# Altium PCB PCB1.PcbDoc
Units mm, origin at the board's own origin, x right, y up, seen from the top; angles counter-clockwise.
Board outline 42.32 x 32.64 mm, 2 copper layers (Top Layer, Bottom Layer); 25 components, 32 nets, 145 pads, 19 vias.
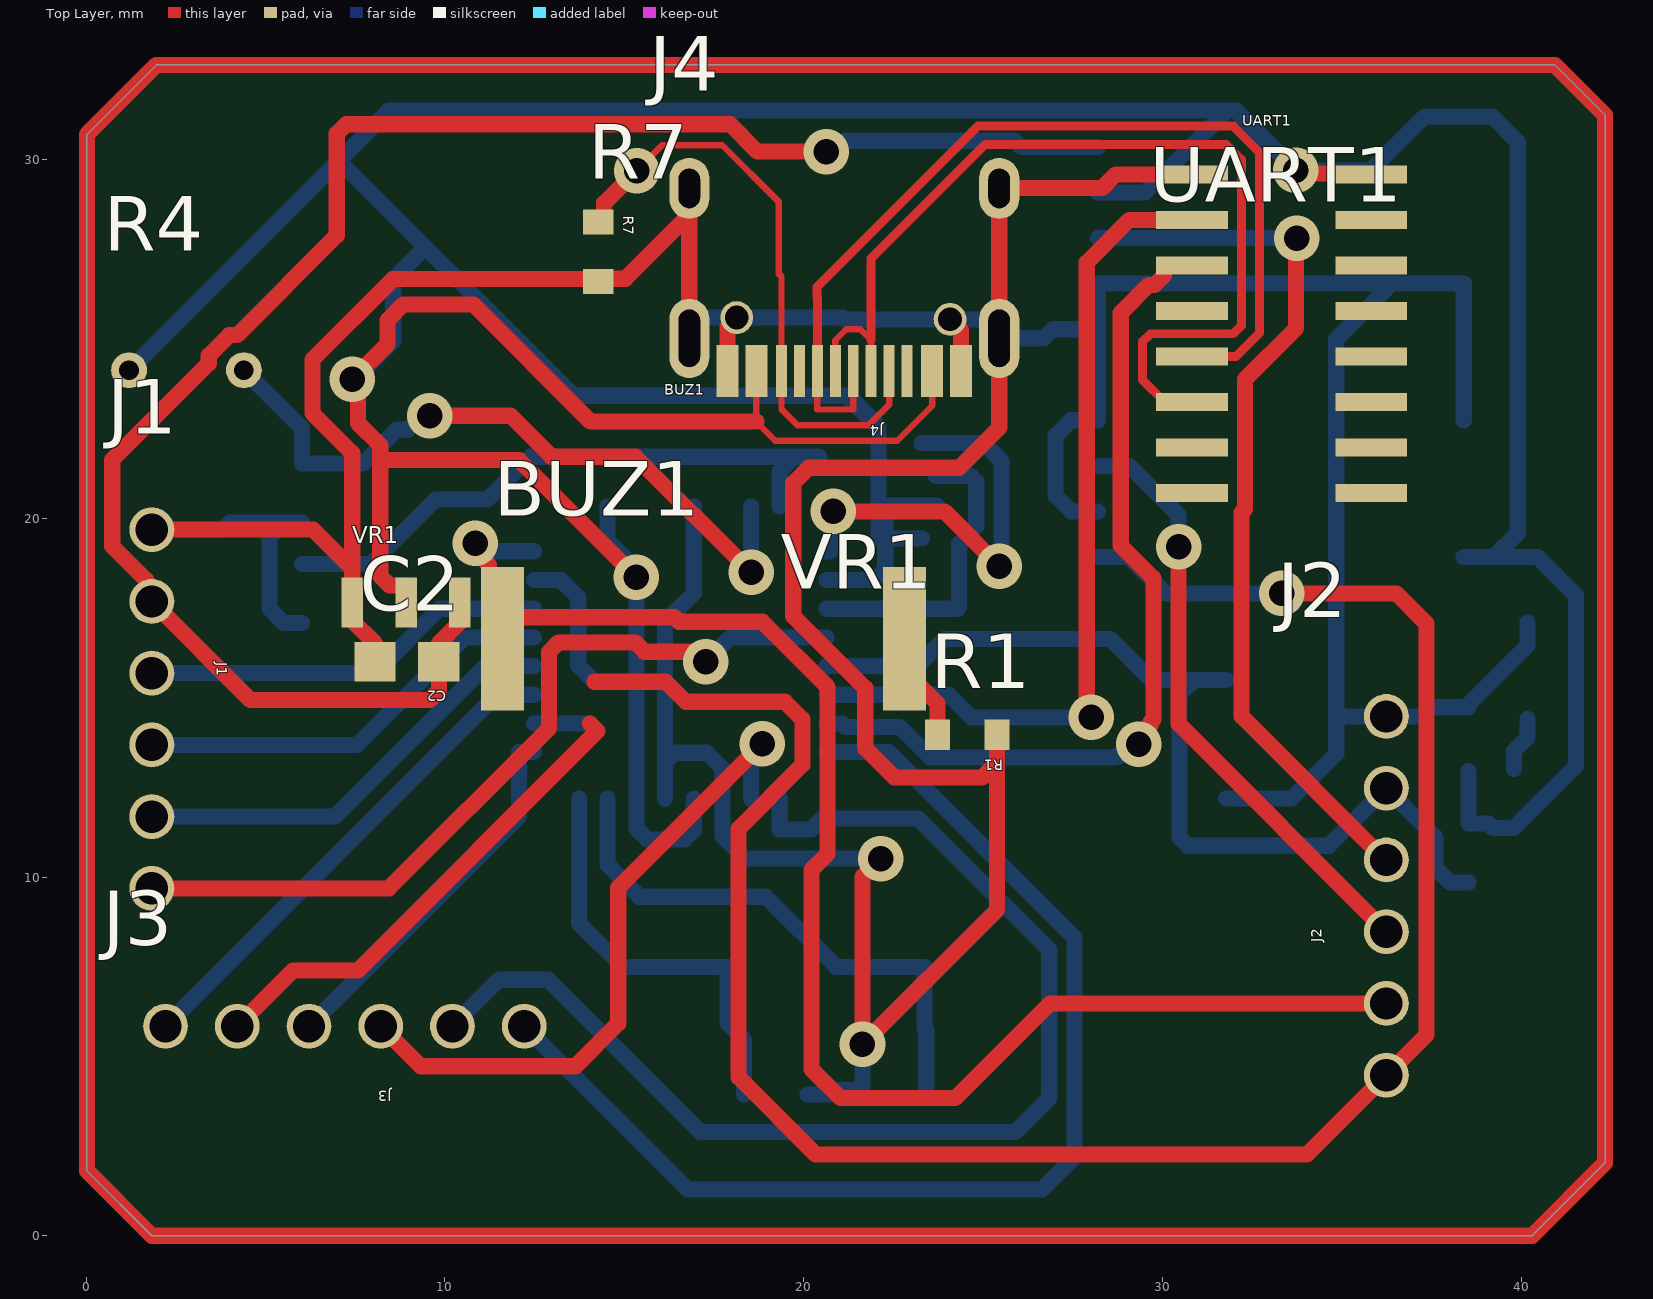
[diagram p0: Top Layer view]
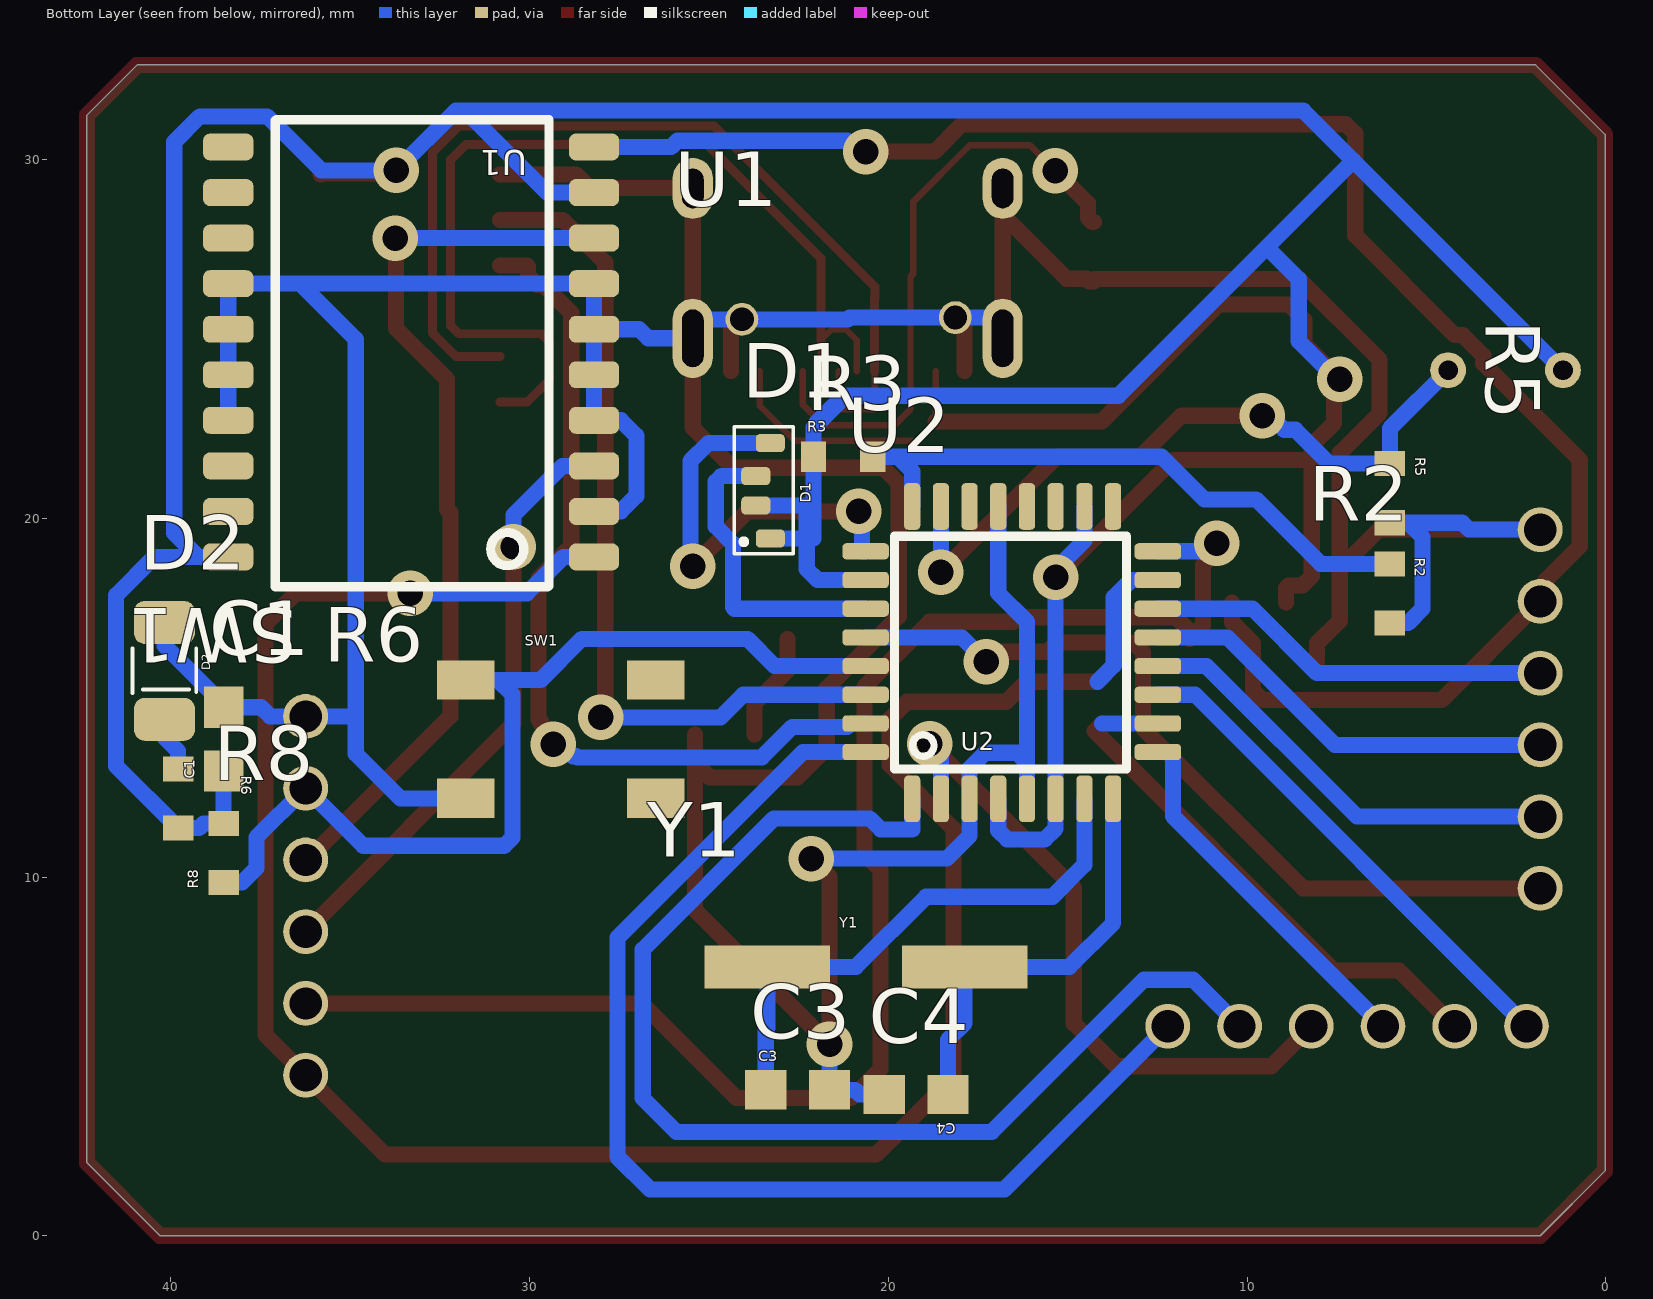
[diagram p1: Bottom Layer view, seen from below]
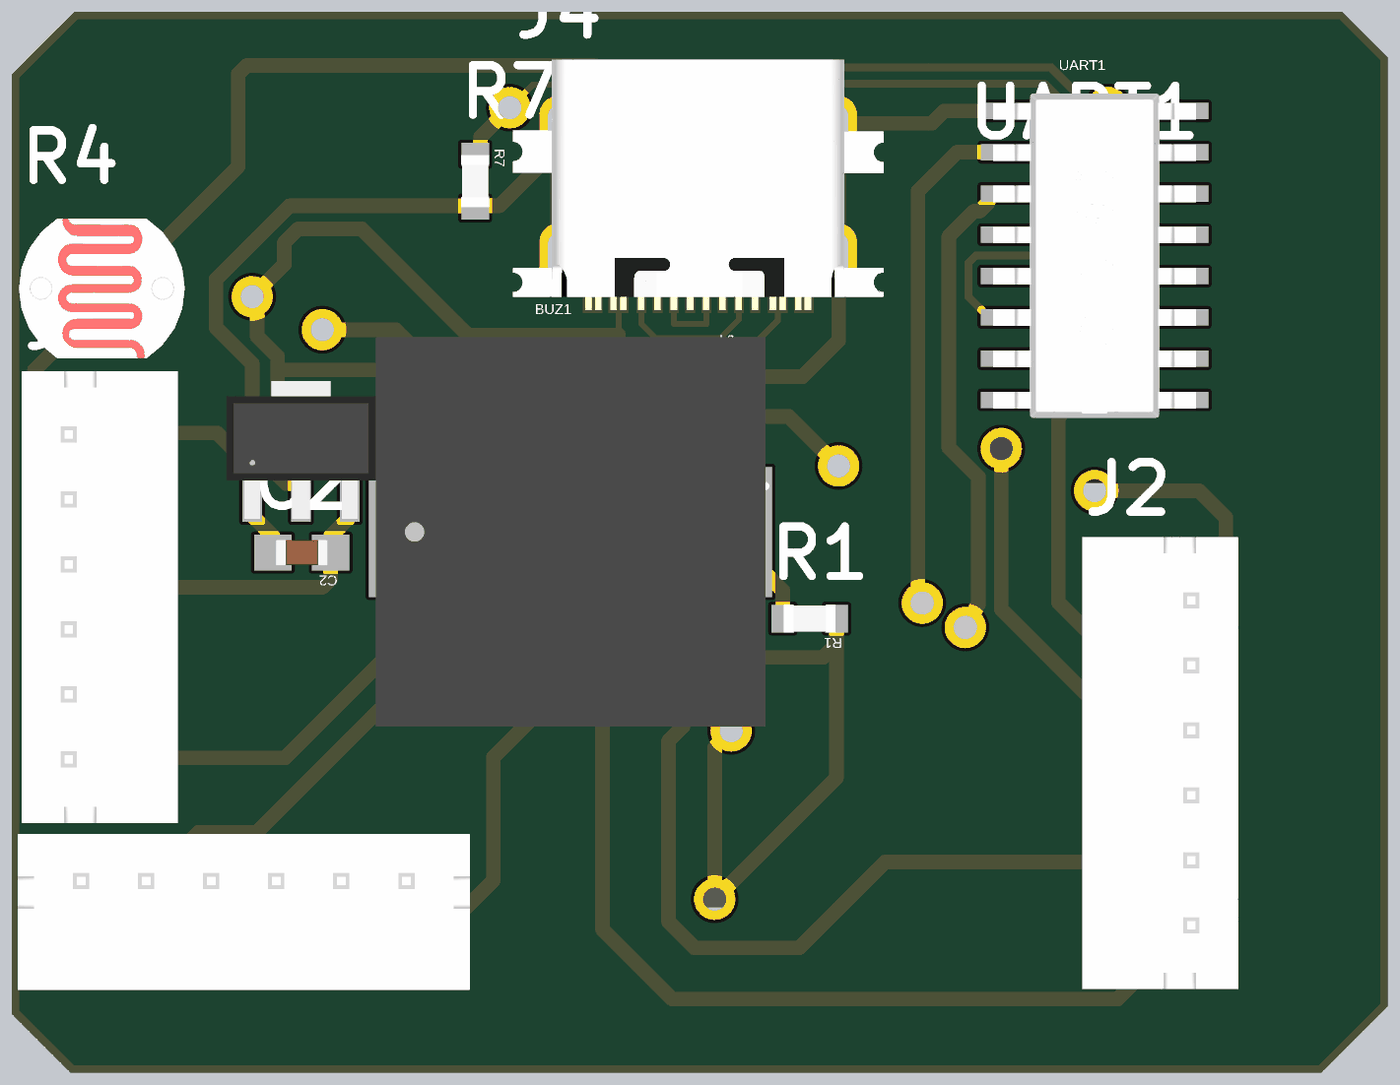
[diagram p2: 3D render of the assembled board from above, using the file's embedded part models]
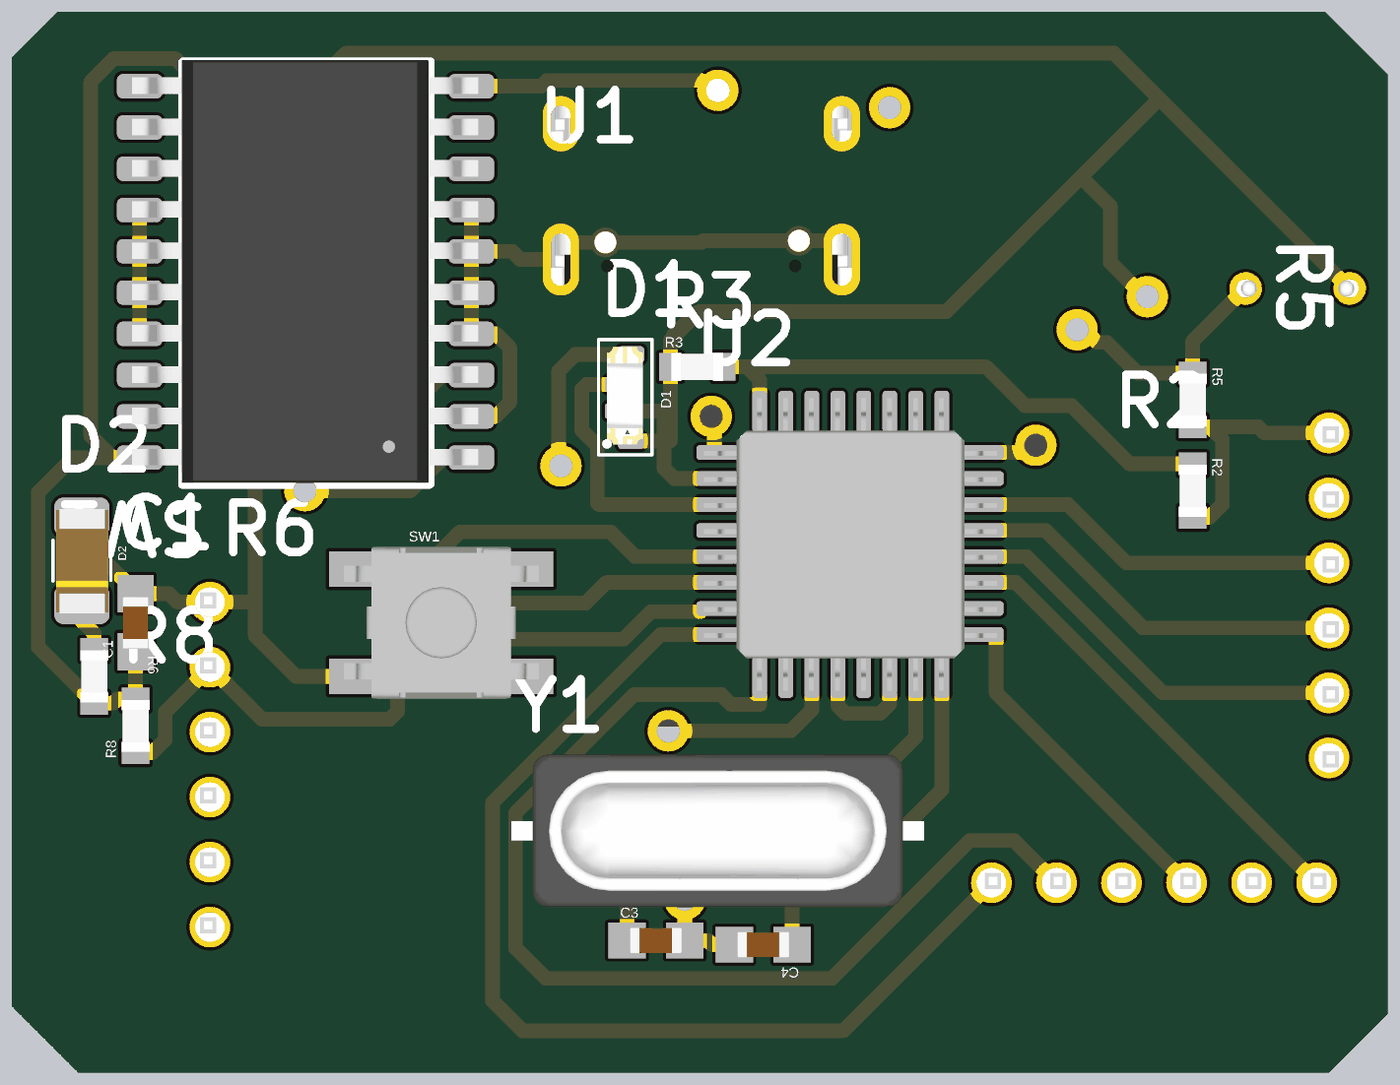
[diagram p3: 3D render of the assembled board from below, using the file's embedded part models]

## Layer stack, top to bottom
Top Solder: solder mask 0.0102, Solder Resist, Dk 3.5
Top Layer: signal copper 0.0356
Dielectric 1: dielectric 0.32, FR-4, Dk 4.8
Bottom Layer: signal copper 0.0356
Bottom Solder: solder mask 0.0102, Solder Resist, Dk 3.5

## Board outline
0.021,1.808 1.829,0 40.31,0 42.342,2.032 42.342,31.242 40.945,32.639 1.956,32.639 0.021,30.704

## Design rules (kind name [scope] priority, off if disabled: settings)
Clearance [All] p1: gap=0.254 ignorepadtopadclearanceinfootprint=FALSE except(0: Arc-Hole Track-Hole SMDPad-Hole THPad-Hole Via-Hole Fill-Hole Poly-Hole Region-Hole Text-Hole)
PolygonConnect [All] p1: connectstyle=Relief reliefconductorwidth=0.254 reliefentries=4 polygonreliefangle="90 Angle" airgapwidth=0.254
RoutingVias [All] p1: holewidth=0.711 width=1.27 viastyle="Through Hole" minholewidth=0.711 minwidth=1.27 maxholewidth=0.711 maxwidth=1.27
SolderMaskExpansion [All] p1: expansion=0.102 istentingtop=FALSE
Width [OnLayer('Bottom Layer')] p1: maxlimit=1 minlimit=0.125 preferedwidth=0.45 checkconnectedcopper=TRUE
30 further rules are at their usual default settings.

## Classes and differential pairs
component class Sheet1: C1 C2 C3 C4 D1 D2 J1 J2 J3 KP1 R1 R2 R3 R4 R5 R6 R7 R8 SW1 U1 U2 VR1 Y1

## Components (designator, comment, footprint, x,y, rotation, side; value= is the part's Value field where it differs from the comment)
BUZ1 "Buzzer" Buzzer 17.208,16.637 r0 top
C1 "0.1uF" "Capacitor 0603 SMD" 38.532,13.843 r90 bottom
C2 "1uF" "Capacitor 0603 SMD" 8.941,16.002 r180 top
C3 "22pF" "Capacitor 0603 SMD" 22.53,4.064 r180 bottom
C4 "22pF" "Capacitor 0603 SMD" 19.228,3.937 r0 bottom
D1 "RGB" RGB 23.292,19.438 r90 bottom
D2 "LED" LED 40.183,15.748 r90 bottom
J1 "6P 2mm Pin Headers" "6P 2mm Pin header" 1.829,14.684 r270 top
J2 "6P 2mm Pin Headers" "6P 2mm Pin header" 36.246,9.477 r90 top
J3 "6P 2mm Pin Headers" "6P 2mm Pin header" 7.21,5.842 r180 top
J4 "TYPE-C-31-M-12" "USB TYPE C-31-M-12" 21.133,26.797 r180 top
R1 "1k ohm" "Resistor 0603 SMD" 24.562,13.97 r180 top
R2 "10K ohm" "Resistor 0603 SMD" 6.02,17.907 r270 bottom
R3 "10k ohm" "Resistor 0603 SMD" 21.26,21.717 r180 bottom
R4 "Photoresistors 8kΩ~20kΩ" "Photoresistor GL5528" 2.794,24.13 r0 top
R5 "10k ohm" "Resistor 0603 SMD" 6.02,20.701 r270 bottom
R6 "1k ohm" "Resistor 0603 SMD" 39.802,12.192 r270 bottom
R7 "5.1k ohm" "Resistor 0603 SMD" 14.275,27.432 r270 top
R8 "10k ohm" "Resistor 0603 SMD" 38.532,10.668 r90 bottom
SW1 "Tact Switch" "Tact Switch" 29.134,13.843 r180 bottom
U1 "Motor_Driver" L293D 28.205,30.353 r0 bottom
U2 "ATmega 8A" "ATmega 8A" 16.561,16.256 r180 bottom
UART1 "USB to UART (CH340C)" "(USB-UART) CH340C" 33.325,25.146 r0 top
VR1 "Regulator 5V" "Regulator 5V AMS1117" 8.917,17.653 r0 top
Y1 "Crystal 16Mhz" "Crystal 16Mhz" 20.625,7.493 r180 bottom

## Footprints (in the part's own frame and the unit in brackets; to place one, negate y for a bottom-side part, rotate by r counter-clockwise, add the part's x,y. Pads: shape width x height; smd on the part's side, far side on the other; paste and mask are expansions set on the pad)
"6P 2mm Pin header" [mm]
  round 1.25 hole 0.9: 1(-5,0) 2(-3,0) 3(-1,0) 4(1,0) 5(3,0) 6(5,0)
  body extent -6.9,-1.5 7,3.3, height 6.17
"(USB-UART) CH340C" [mm]
  rect 2x0.5 smd: 1(-2.5,4.445) 2(-2.5,3.175) 3(-2.5,1.905) 4(-2.5,0.635) 5(-2.5,-0.635) 6(-2.5,-1.905) 7(-2.5,-3.175) 8(-2.5,-4.445) 9(2.5,-4.445) 10(2.5,-3.175) 11(2.5,-1.905) 12(2.5,-0.635) 13(2.5,0.635) 14(2.5,1.905) 15(2.5,3.175) 16(2.5,4.445)
  body extent -3.12,-5 3.12,4.98, height 1.58
"ATmega 8A" [mm]
  rrect50% 0.45x1.3 smd: 1(-2.775,-4.075) 2(-1.975,-4.075) 3(-1.175,-4.075) 4(-0.375,-4.075) 5(0.425,-4.075) 6(1.225,-4.075) 7(2.025,-4.075) 8(2.825,-4.075) 17(2.825,4.075) 18(2.025,4.075) 19(1.225,4.075) 20(0.425,4.075) 21(-0.375,4.075) 22(-1.175,4.075) 23(-1.975,4.075) 24(-2.775,4.075)
  rrect50% 1.3x0.45 smd: 9(4.075,-2.775) 10(4.075,-1.975) 11(4.075,-1.175) 12(4.075,-0.375) 13(4.075,0.425) 14(4.075,1.225) 15(4.075,2.025) 16(4.075,2.825) 25(-4.075,2.825) 26(-4.075,2.025) 27(-4.075,1.225) 28(-4.075,0.425) 29(-4.075,-0.375) 30(-4.075,-1.175) 31(-4.075,-1.975) 32(-4.075,-2.775)
  silkscreen extent -3.27,-3.25 3.2,3.25, body extent -4.48,-4.5 4.51,4.5, height 1.1
Buzzer [mm]
  rect 1.2x4 smd: 1(-5.6,0) 2(5.6,0)
  body extent -5.99,-5.99 5.99,5.99, height 3
"Capacitor 0603 SMD" [mm]
  rect 1.15x1.1 smd: 1(-0.889,0) 2(0.889,0)
  body extent -0.8,-0.4 0.8,0.4, height 0.6
"Crystal 16Mhz" [mm]
  rect 3.5x1.2 smd: 1(-2.75,0) 2(2.75,0)
  body extent -6.35,-2.4 6.35,2.3, height 4.2
L293D [mm]
  rrect50% 1.4x0.75 smd: 1(0,11.43) 2(0,10.16) 3(0,8.89) 4(0,7.62) 5(0,6.35) 6(0,5.08) 7(0,3.81) 8(0,2.54) 9(0,1.27) 10(0,0) 11(10.2,0) 12(10.2,1.27) 13(10.2,2.54) 14(10.2,3.81) 15(10.2,5.08) 16(10.2,6.35) 17(10.2,7.62) 18(10.2,8.89) 19(10.2,10.16) 20(10.2,11.43)
  silkscreen extent 1.26,-0.76 8.89,12.26, body extent -0.21,-0.8 10.43,12.2, height 2.64
LED [mm]
  rrect50% 1.2x1.7 smd: 1(-1.35,0) 2(1.35,0)
  silkscreen extent -0.62,-0.89 0.63,0.89, body extent -1.61,-0.81 1.59,0.79, height 0.71
"Photoresistor GL5528" [mm]
  round 1 hole 0.55: 1(-1.6,0) 2(1.6,0)
  body extent -2.55,-2.15 2.55,2.15, height 2.6
"Regulator 5V AMS1117" [mm]
  rect 0.6x1.4 smd: 1(-1.5,0) 2(0,0) 3(1.5,0)
  body extent -2.3,-0.62 2.3,3.62, height 1.65
"Resistor 0603 SMD" [mm]
  rect 0.7x0.85 smd: 1(-0.825,0) 2(0.825,0)
  body extent -0.8,-0.43 0.8,0.43, height 0.48
RGB [mm]
  rrect50% 0.51x0.81 smd: 1(0.92,0.405) 2(0,0) 3(2.66,0) 4(1.74,0.405)
  silkscreen extent -0.43,-0.64 3.12,1, body extent -0.11,-0.36 2.89,0.74, height 1.5
"Tact Switch" [mm]
  rect 1.6x1.1 smd: 1(-2.65,1.65) 2(2.65,1.65) 3(-2.65,-1.65) 4(2.65,-1.65)
  body extent -3,-2.34 3,2.34, height 1.6
"USB TYPE C-31-M-12" [mil]
  oval 44x67 / inner round 60 / far side oval 44x67 hole 23.62 slot 43.31 at 90 deg paste-99999 mask+0: 13(-170.08,-94.56) 13(170.08,-94.56)
  oval 44x87 / inner round 60 / far side oval 44x87 hole 23.62 slot 62.99 at 90 deg paste-99999 mask+0: 13(-170.08,70) 13(170.08,70)
  round 36 / inner round 60 / far side round 36 hole 26 paste-99999 mask-18: 13(-116.14,49.21) 13(118.11,47.24)
  rect 24x57 smd paste-28.5 mask-28.5: A1-B12(-127.96,106.07) A4-B9(-96.45,106.07) B1-A12(127.96,106.07) B4-A9(96.45,106.07)
  rect 12x57 smd paste-28.5 mask-28.5: A5(-49.22,106.07) A6(-9.84,106.07) A7(9.85,106.07) A8(49.22,106.07) B5(68.91,106.07) B6(29.54,106.07) B7(-29.53,106.07) B8(-68.91,106.07)
  body extent -224,-172 224,131, height 126

## Part data
BUZ1: "BUZZER PIEZO 1.5V 12X12MM SMD / Buzzers Transducer, Externally Driven Piezo 1.5 V 4kHz 84dB @ 1.5V, 10cm Surface Mount Solder Pads", manufacturer="Murata Electronics", Manufacturer Product Number=PKLCS1212E4001-R1, Supplier Part Number="490-4683-2-ND - Tape & Reel (TR)", supplier=DigiKey
C1: library part "Capacitor 0.1uF", "50V 100nF X7R ±10% 0603 Multilayer Ceramic Capacitors MLCC - SMD/SMT ROHS", manufacturer=YAGEO, Manufacturer Product Number=CC0603KRX7R9BB104, Supplier Part Number=C14663, supplier=LCSC
C2: library part "Capacitor 1uF", "16V 1uF X5R ±10% 0603 Multilayer Ceramic Capacitors MLCC - SMD/SMT ROHS", manufacturer="Samsung Electro-Mechanics", Manufacturer Product Number=CL10A105KO8NNNC, Supplier Part Number=C1592, supplier=LCSC
C3 C4: library part "Capacitor 22pF", "50V 22pF NP0 ±5% 0603 Multilayer Ceramic Capacitors MLCC - SMD/SMT ROHS", manufacturer=YAGEO, Manufacturer Product Number=CC0603JRNPO9BN220, Supplier Part Number=C105620, supplier=LCSC
D1: "SMD,1.5x3mm RGB LEDs ROHS", manufacturer=MEIHUA, Mfr. Part #=MHS110RGBCT, supplier=LCSC, supplier Part #=C389528
D2: "360mcd 515nm~530nm Emerald 1206 LED Indication - Discrete ROHS", manufacturer="Everlight Elec", Mfr. Part #=15-21/GHC-XS1T1/3T, supplier=LCSC, supplier Part #=C2984261
J1 J2 J3: "Connector Header Through Hole 6 position 0.079\" (2.00mm)", manufacturer="TE Connectivity AMP Connectors", manufacturer part number=2355172-6, Supplier Part Number=17-2355172-6-ND, supplier=DigiKey
J4: "5A 1 16P Female Type-C SMD USB Connectors ROHS", manufacturer="Korean Hroparts Elec", Supplier Part Number=C165948, Manufacturer Product Number=TYPE-C-31-M-12, supplier=LCSC
R1 R6: library part "Resistor 1k Ohm", "100mW Thick Film Resistors 75V ±100ppm/℃ ±1% 1kΩ 0603 Chip Resistor - Surface Mount ROHS", manufacturer="UNI-ROYAL(Uniroyal Elec)", Manufacturer Product Number=0603WAF1001T5E, Supplier Part Number=C21190, supplier=LCSC
R2: library part "NTC Thermo (ERT-J1VR103J)", "THERMISTOR NTC 10KOHM 4250K 0603", manufacturer="Panasonic Electronic Components", Manufacturer Product Number=ERT-J1VR103J, Supplier Part Number="P10547TR-ND - Tape & Reel (TR)", supplier=DigiKey
R3 R5 R8: library part "Resistor 10k Ohm", "100mW Thick Film Resistors 75V ±100ppm/℃ ±1% 10kΩ 0603 Chip Resistor - Surface Mount ROHS", manufacturer="UNI-ROYAL(Uniroyal Elec)", Manufacturer Product Number=0603WAF1002T5E, Supplier Part Number=C25804, supplier=LCSC
R4: "8kΩ~20kΩ 540nm 1MΩ Plugin,P=3mm Photoresistors ROHS", manufacturer="Senba Sensing Tech", Manufacturer Product Number=GL5528, Supplier Part Number=C125627, supplier=LCSC
R7: library part "Resistor 5.1k Ohm", "100mW Thick Film Resistors 75V ±100ppm/℃ ±1% 5.1kΩ 0603 Chip Resistor - Surface Mount ROHS", manufacturer="UNI-ROYAL(Uniroyal Elec)", Manufacturer Product Number=0603WAF5101T5E, Supplier Part Number=C23186, supplier=LCSC
SW1: "SWITCH TACTILE SPST-NO 0.05A 12V / Tactile Switch SPST-NO Top Actuated Surface Mount", manufacturer=C&K, Manufacturer Product Number="PTS 647 SN50 SMTR2 LFS", Supplier Part Number="PTS647SN50SMTR2LFSTR-ND - Tape & Reel (TR)", supplier=DigiKey
U1: library part L293D, "SOIC-20-300mil Stepper Motor Driver ROHS", manufacturer=STMicroelectronics, Mfr. Part #=L293DD013TR, supplier=LCSC, supplier Part #=C21610
U2: "8KB 1KB FLASH 23 2.7V~5.5V AVR 16MHz TQFP-32(7x7) Microcontrollers (MCU/MPU/SOC) ROHS", manufacturer="Microchip Tech", Mfr. Part #=ATMEGA8A-AU, supplier=LCSC, supplier Part #=C16190
UART1: "2Mbps Transceiver USB 2.0 SOP-16 USB Converters ROHS", manufacturer="WCH(Jiangsu Qin Heng)", Manufacturer Product Number=CH340C, Supplier Part Number=C84681, supplier=LCSC
VR1: "1A Fixed 5V Positive electrode 18V SOT-89 Voltage Regulators - Linear, Low Drop Out (LDO) Regulators ROHS", manufacturer=MSKSEMI, Manufacturer Product Number=AMS1117-5.0V, Supplier Part Number=C7473143, supplier=LCSC
Y1: "16 MHz ±30ppm Crystal 20pF 50 Ohms HC-49/US", manufacturer="ECS Inc.", Manufacturer Product Number=ECS-160-20-3X-TR, Supplier Part Number="XC1776TR-ND - Tape & Reel (TR)", supplier=DigiKey

## Via types
v1: diameter 1.27, hole 0.711, Top Layer to Bottom Layer, 19 vias

## Nets (pads, with @x,y where several pads share a name; then routed paths per layer and width w, separated by ;. In a path a pad name is that pad's centre, name@x,y a point inside that pad or via, vN(x,y) a via of type N, cw(c..) or ccw(c..) an arc to the next point about the centre after c; other vN are vias at no path point)
A0: R4.2 R5.1 U2.23 | length 20
  Top Layer w0.45: v1(9.576,22.86) 11.83,22.86 12.973,21.717 15.31,21.717 v1(18.536,18.491)
  Bottom Layer w0.45: R4.2 6.02,22.504 R5.1 7.708,21.526 8.653,22.47 8.964,22.47 9.354,22.86 v1(9.576,22.86) ; v1(18.536,18.491) U2.23
A1: R2.1 R3.2 U2.24 | length 17.2
  Bottom Layer w0.45: R2.1 7.95,18.732 9.745,20.527 11.191,20.527 12.382,21.717 19.742,21.717 ; U2.24 19.336,21.311 19.742,21.717 ; R3.2 19.742,21.717
A2: D1.3 U2.25 | length 11.9
  Top Layer w0.45: v1(20.828,20.193) 23.927,20.193 v1(25.451,18.669)
  Bottom Layer w0.45: U2.25 20.732,19.081 20.732,20.097 v1(20.828,20.193) ; D1.3 25.019,22.098 25.517,21.6 25.517,18.735 v1(25.451,18.669)
A3: D1.1 U2.26 | length 5
  Bottom Layer w0.45: U2.26 21.971,18.281 22.276,18.586 22.276,20.358 D1.1
A4: D1.4 U2.27 | length 8.6
  Bottom Layer w0.45: U2.27 24.288,17.481 24.334,17.527 24.334,19.295 24.813,19.774 24.813,21.025 24.66,21.178 D1.4
A5: J1.6 U2.28 | length 23.4
  Top Layer w0.45: J1.6 8.439,9.684 12.903,14.148 12.903,16.277 13.167,16.54 15.308,16.54 15.567,16.281 16.993,16.281 v1(17.272,16.002)
  Bottom Layer w0.45: v1(17.272,16.002) 17.951,16.681 U2.28
D2: J3.1 U2.32 | length 32.8
  Bottom Layer w0.45: J3.1 16.764,1.288 26.645,1.288 27.552,2.195 27.552,8.313 22.384,13.481 U2.32
D3: J3.2 U2.1 | length 33.5
  Bottom Layer w0.45: J3.2 11.505,7.137 12.878,7.137 17.12,2.896 25.908,2.896 26.848,3.835 26.848,7.975 23.188,11.635 20.525,11.635 20.218,11.328 19.336,11.328 U2.1
D4: J3.3 U2.2 | length 18.7
  Top Layer w0.45: J3.3 9.327,4.724 13.64,4.724 14.834,5.918 14.834,9.703 v1(18.847,13.716)
  Bottom Layer w0.45: U2.2 18.536,13.405 v1(18.847,13.716)
D5: J3.4 U2.9 | length 10.5
  Bottom Layer w0.45: J3.4 12.065,11.697 12.065,13.481 U2.9
D6: J3.5 U2.10 | length 15.3
  Top Layer w0.45: J3.5 5.759,7.391 7.569,7.391 14.249,14.072 14.04,14.281
  Bottom Layer w0.45: U2.10 14.04,14.281
D7: J3.6 U2.11 | length 14.1
  Bottom Layer w0.45: J3.6 11.449,15.081 U2.11
D8: J1.5 U2.12 | length 12.4
  Bottom Layer w0.45: J1.5 6.934,11.684 11.131,15.881 U2.12
D9: J1.4 U2.13 | length 11.9
  Bottom Layer w0.45: J1.4 7.55,13.684 10.547,16.681 U2.13
D10: J1.3 U2.14 | length 11.4
  Bottom Layer w0.45: J1.3 8.05,15.684 9.847,17.481 U2.14
DN: J4.A7 J4.B7 UART1.6 | length 27.3
  Top Layer w0.18: J4.A7 20.883,24.968 21.188,25.273 21.578,25.273 21.883,24.968 J4.B7
  Top Layer w0.25: 21.883,24.968 21.883,27.247 25.064,30.429 31.773,30.429 32.204,29.998 32.204,25.374 31.976,25.146 29.674,25.146 29.446,24.918 29.446,23.87 30.075,23.241 UART1.6
DP: J4.A6 J4.B6 UART1.5 | length 27.2
  Top Layer w0.18: 20.371,26.162 20.383,26.15 ; J4.B6 20.383,23.035 21.383,23.035 J4.A6
  Top Layer w0.25: 20.371,26.162 20.371,26.448 24.856,30.933 31.982,30.933 32.708,30.207 32.708,25.165 32.054,24.511 UART1.5 ; J4.B6 20.383,26.15
GND: C1.2 C2.2 C3.2 C4.2 D2.2 J1.1 J2.6 J4.13 J4.A1-B12 J4.B1-A12 R1.1 R2.2 R5.2 R7.2 SW1.3 U1.2 U1.4 U1.5 U1.6 U1.7 U1.14 U1.15 U1.16 U1.17 U2.3 U2.5 U2.21 UART1.1 VR1.1 | length 168.1
  Top Layer w0.45: J1.1 6.325,19.684 7.417,18.592 ; C2.2 8.052,16.51 7.417,17.145 VR1.1 7.417,18.592 ; J4.13@16.813,25.019 16.813,28.003 16.813,28.219 J4.13@16.813,28.459 ; J4.13@16.813,29.199 J4.13@16.813,28.459 ; J4.B1-A12 17.883,25.347 J4.13@18.133,25.597 ; v1(22.149,10.516) 21.641,10.008 v1(21.641,5.334) 25.387,9.08 25.387,13.183 ; J4.13@24.083,25.547 24.383,25.247 J4.A1-B12 ; R1.1 25.387,13.183 ; UART1.1 28.702,29.591 28.321,29.21 25.453,29.21 25.453,29.199 25.453,25.019 25.453,22.53 24.335,21.412 20.142,21.412 19.71,20.98 19.71,17.272 21.717,15.265 21.717,13.589 22.53,12.776 24.98,12.776 25.387,13.183 ; 7.417,18.592 7.417,21.819 6.303,22.933 6.303,24.421 8.552,26.67 14.275,26.67 R7.2 14.403,26.607 14.475,26.679 15.033,26.679 J4.13@16.813,28.459
  Bottom Layer w0.45: J1.1 3.81,19.684 4.002,19.876 5.512,19.876 ; R2.2 5.512,17.082 5.105,17.488 5.105,19.47 5.512,19.876 ; R5.2 5.512,19.876 ; U2.5 16.136,13.183 ; J4.13@16.813,25.019 16.813,25.597 18.133,25.597 21.082,25.597 21.132,25.547 24.083,25.547 25.453,25.547 25.453,25.019 26.695,25.019 26.949,25.273 U1.6 ; U2.21 16.936,17.916 16.136,17.116 16.136,13.183 ; C4.2 20.803,3.937 20.93,4.064 C3.2 v1(21.641,5.334) ; v1(22.149,10.516) 18.371,10.516 17.736,11.151 U2.3 17.736,13.027 17.297,13.466 16.419,13.466 16.136,13.183 ; U1.2 27.457,20.193 27.026,20.625 27.026,22.301 27.457,22.733 U1.4 U1.5 U1.6 ; SW1.3 33.604,12.193 34.849,13.438 34.849,14.477 ; U1.17 U1.16 U1.15 U1.14 36.398,26.543 ; D2.2 40.183,16.459 38.532,14.808 C1.2 37.491,14.732 37.236,14.477 J2.6 34.849,14.477 ; U1.6 U1.7 36.398,26.543 ; 34.849,14.477 34.849,24.994 36.398,26.543
MISO: BUZ1.1 J2.2 U2.16 | length 43.3
  Top Layer w0.45: v1(10.846,19.304) 10.846,19.082 11.233,18.695 11.233,17.012 BUZ1.1 11.608,16.869 11.983,17.244 16.402,17.244 16.53,17.116 18.85,17.116 20.668,15.299 20.668,10.645 20.218,10.196 20.218,4.648 21.031,3.835 24.232,3.835 26.873,6.477 J2.2
  Bottom Layer w0.254: v1(10.846,19.304) 10.967,19.304 v1@11.19,19.081
  Bottom Layer w0.45: v1@11.19,19.081 U2.16
MOSI: J2.1 U1.1 U2.15 | length 63.8
  Top Layer w0.45: 14.17,15.446 16.158,15.446 16.716,14.888 19.478,14.888 19.964,14.402 19.964,13.127 18.186,11.349 18.186,4.42 20.345,2.261 34.029,2.261 J2.1 37.363,5.595 37.363,17.069 36.525,17.907 v1(33.325,17.907)
  Bottom Layer w0.45: U2.15 13.233,18.281 13.716,17.798 13.716,15.9 14.17,15.446 ; U1.1 29.061,18.923 30.077,17.907 v1(33.325,17.907)
MOTOR: J2.3 U1.3 | length 16.8
  Top Layer w0.45: v1(30.455,19.202) 30.455,14.268 J2.3
  Bottom Layer w0.45: U1.3 29.083,21.463 30.455,20.091 v1(30.455,19.202)
MOTOR_2: J2.4 U1.8 | length 25.2
  Top Layer w0.18: v1@33.731,27.813 v1(33.752,27.813)
  Top Layer w0.45: v1@33.731,27.813 33.731,25.298 32.304,23.871 32.304,20.253 32.211,20.16 32.211,14.48 J2.4@36.246,10.445
  Bottom Layer w0.45: U1.8 v1(33.752,27.813)
NetBUZ1_2: BUZ1.2 R1.2 | length 3.1
  Top Layer w0.45: BUZ1.2 22.808,15.763 23.737,14.834 R1.2
NetD2_1: D2.1 R6.1 | length 1.5
  Bottom Layer w0.45: R6.1 39.802,13.513 40.183,13.894 D2.1
NetJ4_A5: J4.A5 J4.B5 R7.1 | length 17
  Top Layer w0.18: v1(15.342,29.693) 16.053,30.404 17.729,30.404 19.302,28.831 19.302,26.824 19.383,26.744 19.383,23.038 19.819,22.601 21.819,22.601 22.383,23.165 J4.A5
  Top Layer w0.45: R7.1 14.314,28.257 14.439,28.382 14.439,28.79 v1(15.342,29.693)
POWER: C2.1 J1.2 U1.10 VR1.3 | length 50.3
  Top Layer w0.45: VR1.3 10.417,17.097 9.83,16.51 C2.1 9.83,15.189 9.576,14.935 4.578,14.935 J1.2 1.829,17.56 1.676,17.713 1.676,18.276 0.725,19.227 0.725,21.629 3.415,24.319 3.415,24.536 3.988,25.109 4.205,25.109 6.985,27.889 6.985,30.538 6.985,30.724 7.249,30.988 7.621,30.988 17.95,30.988 18.712,30.226 v1(20.625,30.226)
  Bottom Layer w0.45: v1(20.625,30.226) 20.847,30.226 21.15,30.529 25.883,30.529 26.059,30.353 U1.10
RST: J2.5 R8.1 SW1.1 U2.29 | length 26.9
  Bottom Layer w0.45: U2.29 23.171,15.881 23.927,16.637 28.549,16.637 29.693,15.493 30.883,15.493 ; SW1.1 30.883,15.493 ; R8.1 38.024,9.843 37.617,10.249 37.617,11.105 J2.5 34.64,10.871 30.709,10.871 30.48,11.1 30.48,15.09 30.883,15.493
RXD: U2.30 UART1.2 | length 23.8
  Top Layer w0.45: v1(28.023,14.449) 27.893,14.579 27.893,27.131 29.083,28.321 UART1.2
  Bottom Layer w0.18: v1@28.008,14.464 v1(28.023,14.449)
  Bottom Layer w0.45: U2.30 24.044,15.081 24.676,14.449 v1(28.023,14.449)
TXD: U2.31 UART1.3 | length 24.7
  Top Layer w0.45: v1(29.349,13.697) 29.349,13.919 29.677,14.247 29.677,14.322 29.751,14.395 29.751,18.331 28.842,19.24 28.842,25.725 29.626,26.51 29.786,26.51 30.05,26.774 30.05,27.026 30.075,27.051 UART1.3
  Bottom Layer w0.45: U2.31 21.061,14.281 21.157,14.185 22.675,14.185 23.525,13.335 28.675,13.335 28.706,13.366 28.796,13.366 29.127,13.697 v1(29.349,13.697) ; v1@29.083,13.722 v1@29.324,13.722
VCC: C1.1 D1.2 J4.A4-B9 J4.B4-A9 R3.1 R4.1 R6.2 R8.2 U1.9 U1.20 U2.4 U2.6 U2.18 UART1.16 VR1.2 | length 164.4
  Top Layer w0.18: 18.683,22.694 J4.B4-A9 ; 18.683,22.696 19.212,22.167 22.61,22.167 23.583,23.139 J4.A4-B9
  Top Layer w0.254: 8.698,25.959 10.795,25.959 13.989,22.765 18.754,22.765 18.685,22.696 18.683,22.694
  Top Layer w0.45: 8.196,21.622 12.072,21.622 v1(15.336,18.358) ; VR1.2 8.917,18.053 8.842,18.128 8.459,18.128 8.196,18.392 8.196,21.209 8.196,22.035 7.574,22.657 7.574,23.719 v1(7.417,23.876) 8.402,24.861 8.402,25.524 8.844,25.966 10.788,25.966 14.058,22.696 18.683,22.696 ; v1(33.722,29.702) 33.808,29.616 35.8,29.616 UART1.16
  Bottom Layer w0.254: 21.399,23.419 22.085,22.733 22.085,22.53
  Bottom Layer w0.45: R4.1 7.036,29.972 ; v1(7.417,23.876) 7.498,23.876 8.559,24.936 8.559,26.669 9.449,27.559 ; U2.18 14.536,19.38 15.336,18.58 v1(15.336,18.358) U2.6 15.336,11.354 15.641,11.049 16.688,11.049 16.936,11.297 U2.4 ; D1.2 22.085,19.438 R3.1 22.085,22.53 21.196,23.419 13.589,23.419 7.036,29.972 ; U1.9 29.515,29.083 31.801,31.369 ; U1.20 39.243,18.923 ; C1.1 R8.2 39.091,11.493 39.217,11.367 R6.2 41.529,13.094 41.529,17.856 40.462,18.923 39.243,18.923 ; 7.036,29.972 8.433,31.369 31.801,31.369 ; 31.801,31.369 32.055,31.369 v1(33.722,29.702) 35.816,29.702 37.321,31.207 39.193,31.207 39.909,30.492 39.909,19.589 39.243,18.923
XLAT1: C3.1 U2.7 Y1.1 | length 15.3
  Bottom Layer w0.45: U2.7 14.536,10.338 15.425,9.449 18.948,9.449 20.904,7.493 Y1.1 23.375,5.784 23.419,5.74 C3.1
XLAT2: C4.1 U2.8 Y1.2 | length 11.9
  Bottom Layer w0.45: U2.8 13.736,8.712 14.955,7.493 Y1.2 17.875,5.925 18.339,5.461 C4.1
pads on no net: J4.A8 J4.B8 SW1.2 SW1.4 U1.11 U1.12 U1.13 U1.18 U1.19 U2.17 U2.19 U2.20 U2.22 UART1.4 UART1.7 UART1.8 UART1.9 UART1.10 UART1.11 UART1.12 UART1.13 UART1.14 UART1.15
copper on no net: | length 145.7
  Top Layer w0.45: 0.021,1.808 1.829,0 40.31,0 42.342,2.032 42.342,31.242 40.945,32.639 6.782,32.639 3.861,32.639 1.956,32.639 0.021,30.704 0.021,1.808